# Altium PCB PCB Carte détéction Sans Ecriture.PCBDOC
Units mm, origin at the board's own origin, x right, y up, seen from the top; angles counter-clockwise.
Board outline 299.72 x 199.9 mm, 2 copper layers (Top Layer, Bottom Layer); 31 components, 27 nets, 123 pads, 37 vias.
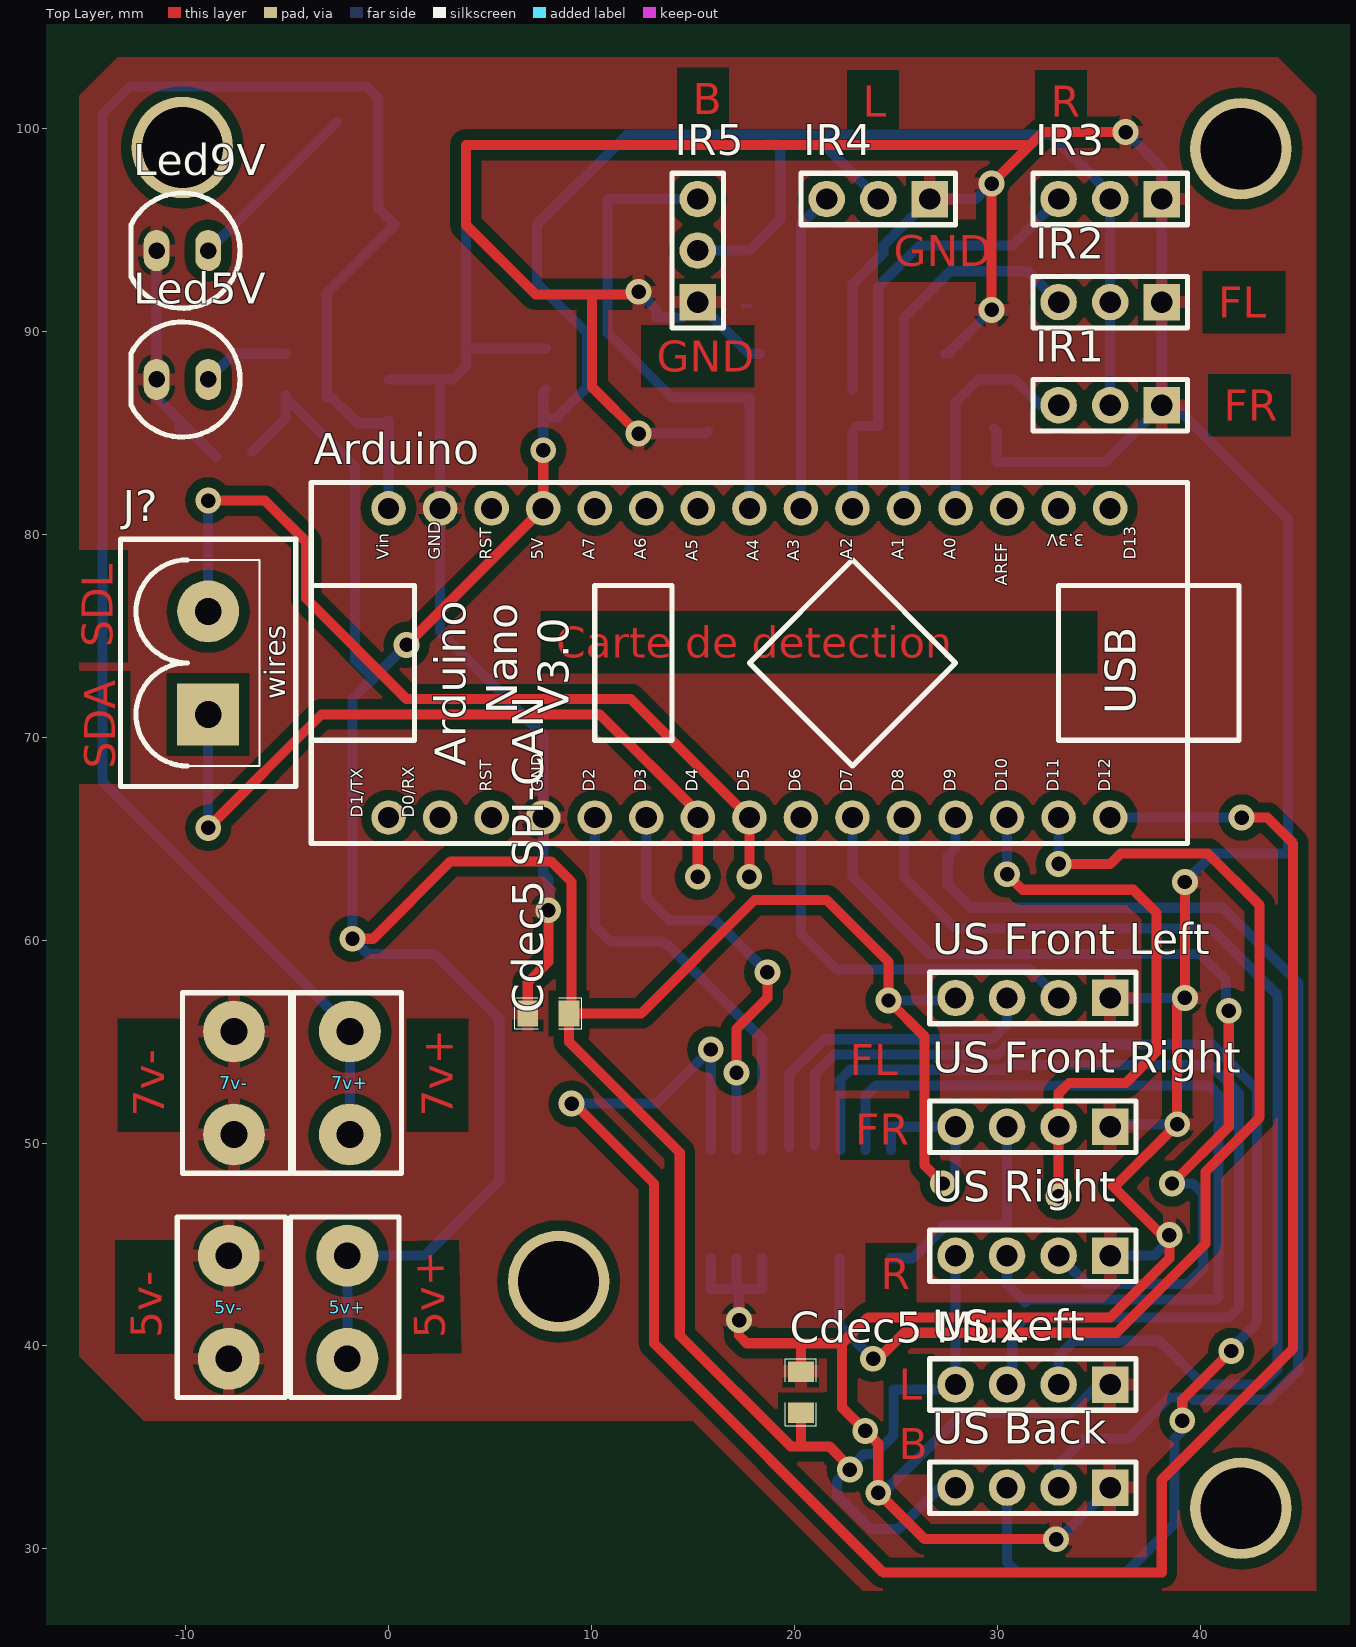
[diagram p0: Top Layer view]
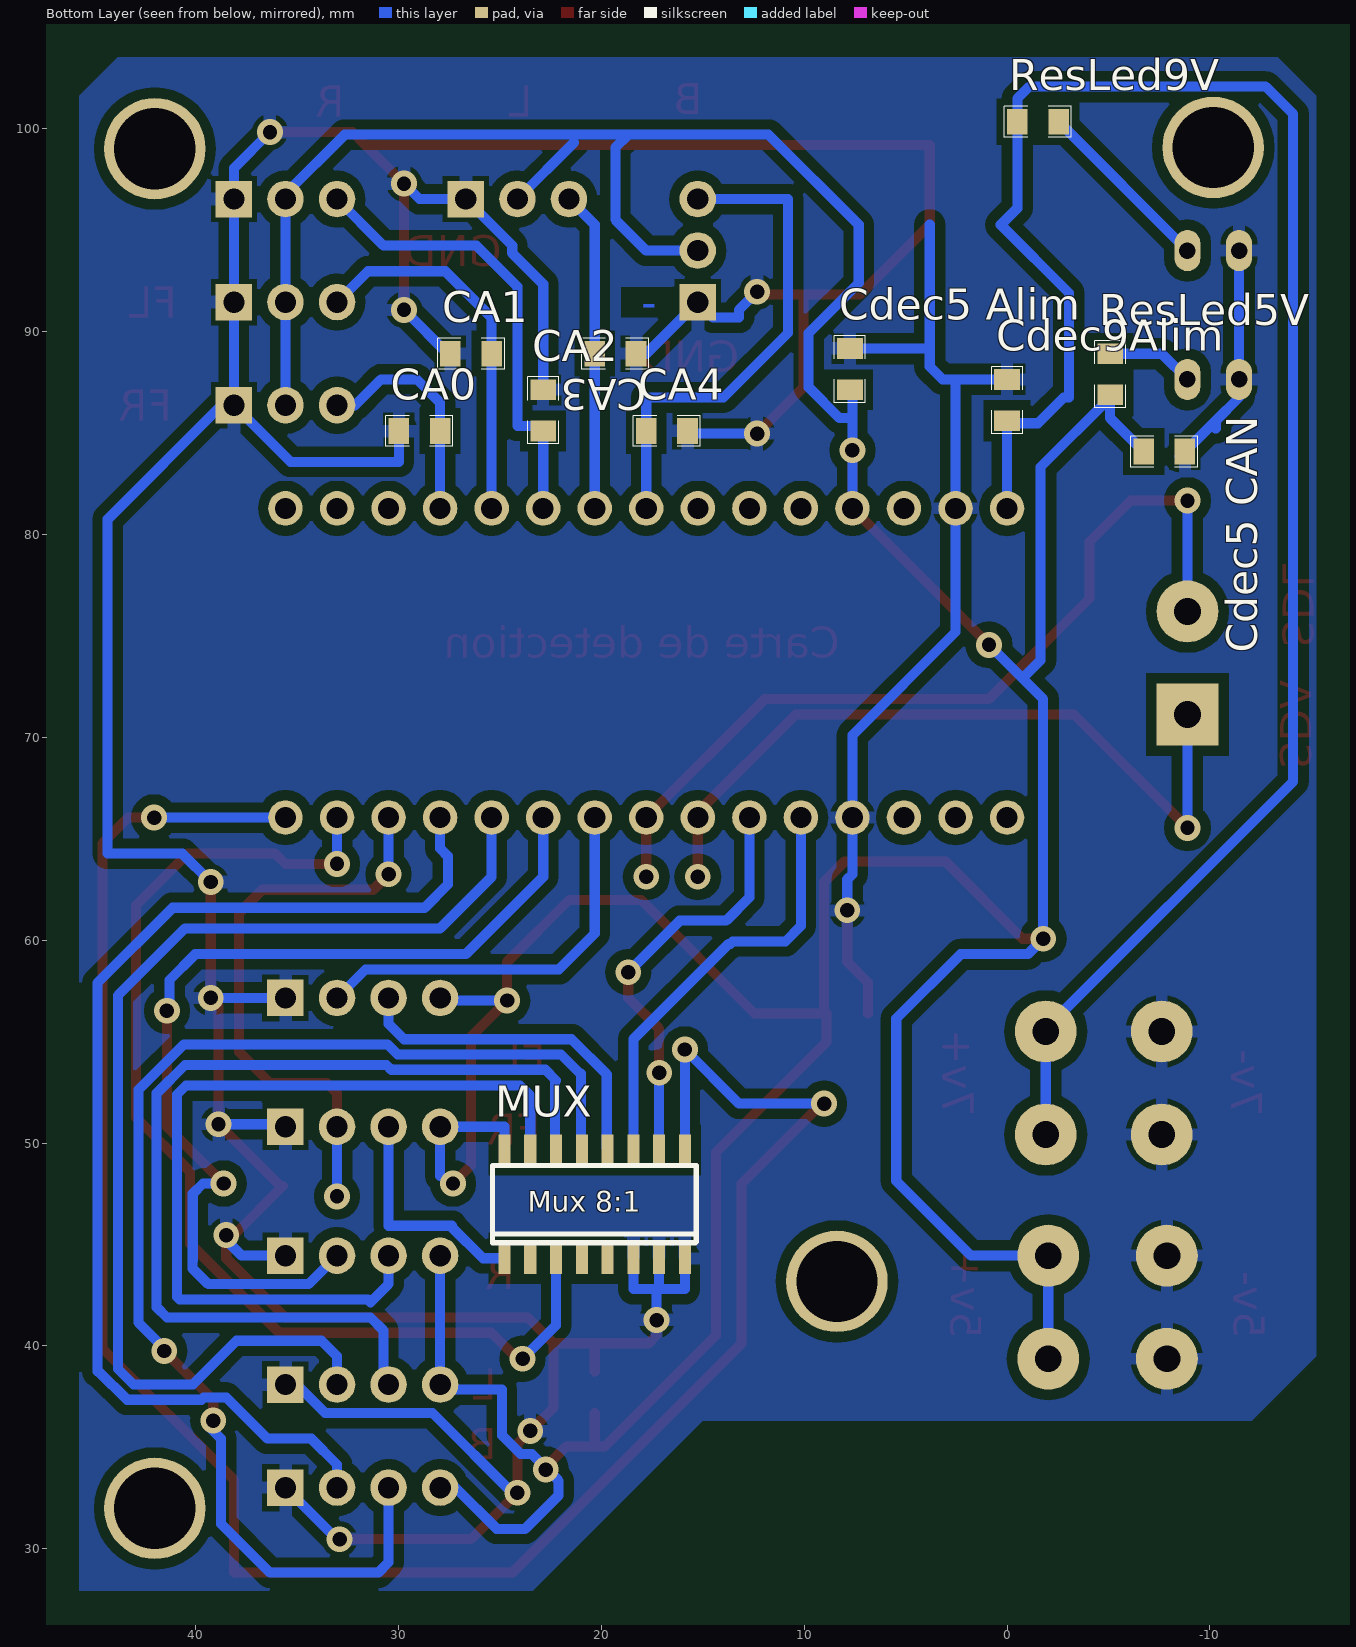
[diagram p1: Bottom Layer view, seen from below]

## Layer stack, top to bottom
Top Solder: solder mask 0.0102, Solder Resist, Dk 3.5
Top Layer: signal copper 0.0356
Dielectric1: dielectric 0.32, FR-4, Dk 4.8
Bottom Layer: signal copper 0.0356
Bottom Solder: solder mask 0.0102, Solder Resist, Dk 3.5

## Board outline
-41.96,-47.66 257.76,-47.66 257.76,152.238 -41.96,152.238

## Design rules (kind name [scope] priority, off if disabled: settings)
Clearance Clearance_bottom_polygon [OnLayer('Bottom Layer') Or OnLayer('Multi-Layer') vs OnLayer('Bottom Layer')  And  InPoly] p1: gap=0.508
Clearance Clearance_top_polygon [OnLayer('Top Layer')  Or OnLayer('Multi-Layer') vs OnLayer('Top Layer') And InPoly] p2: gap=0.508
Clearance Clearance_bottom [OnLayer('Bottom Layer') Or OnLayer('Multi-Layer') vs OnLayer('Bottom Layer')  And Not InPoly] p3: gap=0.254
Clearance Clearance_top [OnLayer('Top Layer')  Or OnLayer('Multi-Layer') vs OnLayer('Top Layer') And Not InPoly] p4: gap=0.254
Clearance Clearance_pad_to_pad [OnLayer('Multi-Layer') vs OnLayer('Multi-Layer')] p5: gap=0.254
ComponentClearance ComponentClearance_bottom [OnLayer('Bottom Overlay') vs OnLayer('Bottom Overlay')] p1: gap=0 collisioncheckmode=3 verticalgap=0.254 showdistances=FALSE
ComponentClearance ComponentClearance_top [OnLayer('Top Overlay') vs OnLayer('Top Overlay')] p2: gap=0 collisioncheckmode=3 verticalgap=0.254 showdistances=FALSE
FabricationTestPointUsage TestPointUsage [All] p1: valid=0 allowmultiple=FALSE
FabricationTestpoint Testpoint [All] p1: side=3 testpointundercomponent=TRUE minsize=1.016 maxsize=2.54 preferedsize=1.524 minholesize=0 maxholesize=1.016 preferedholesize=0.813 testpointgrid=0.025 allowsidetop=TRUE allowsidebottom=TRUE usegrid=TRUE gridtolerance=0
HoleSize [All] p1: absolutevalues=TRUE maxlimit=25.4 minlimit=0.406 maxpercent=80.000 minpercent=20.000
MinimumAnnularRing [PadXSize_AllLayers = PadYSize_AllLayers] p1: minimumring=0.203
PermittedLayers [All] p1: toplayerpermitted=TRUE bottomlayerpermitted=TRUE
PolygonConnect [All] p1: connectstyle=Relief reliefconductorwidth=0.61 reliefentries=4 polygonreliefangle="90 Angle" airgapwidth=0.254
RoutingVias [All] p1: holewidth=0.6 width=1.2 viastyle="Through Hole" minholewidth=0.4 minwidth=0.8 maxholewidth=0.6 maxwidth=10
SMDToPlane [All] p1: distance=0
SolderMaskExpansion [All] p1: expansion=0.102
ViasUnderSMD [All] p1: allowed=FALSE
Width Width_mechanical [OnLayer('Mechanical 1') or OnLayer(' Mechanical 4')] p1: maxlimit=0.254 minlimit=0.254 preferedwidth=0.254
Width Width_botom_top [OnLayer('Bottom Layer') or OnLayer('Top Layer')] p2: maxlimit=254 minlimit=0.5 preferedwidth=0.813 minimp=50.000000 maximp=50.000000 favimp=50.000000
26 further rules are at their usual default settings.

## Components (designator, comment, footprint, x,y, rotation, side; value= is the part's Value field where it differs from the comment)
5v+ "Connector_Cosse" Connector_Cosse -2.032,44.45 r0 top (schematic designator Vcc_5v_+)
5v- "Connector_Cosse" Connector_Cosse -7.874,39.37 r180 top (schematic designator Vcc_5v_-)
7v+ "Connector_Cosse" Connector_Cosse -1.905,55.499 r0 top (schematic designator Vcc_7v_+)
7v- "Connector_Cosse" Connector_Cosse -7.62,50.419 r180 top (schematic designator Vcc_7v_-)
Arduino "Arduino Nano" "Arduino Nano FootPrint" 15.24,73.66 r90 top
CA0 "CAP" 0805 27.94,85.09 r0 bottom
CA1 "CAP" 0805 25.4,88.9 r0 bottom
CA2 "CAP" 0805 22.86,85.09 r90 bottom
CA3 "CAP" 0805 20.32,88.9 r180 bottom
CA4 "CAP" 0805 17.78,85.09 r180 bottom
"Cdec5 Alim" "CAP" 0805 7.747,87.122 r90 bottom
"Cdec5 CAN" "CAP" 0805 -6.731,84.074 r180 bottom
"Cdec5 Mux" "CAP" 0805 20.32,36.703 r90 top
"Cdec5 SPI-CAN" "CAP" 0805 8.89,56.388 r180 top
Cdec9Alim "CAP" 0805 0,87.63 r270 bottom
IR1 "Connecteur InfraRouge" "Connecteur InfraRouge" 35.56,86.36 r90 top
IR2 "Connecteur InfraRouge" "Connecteur InfraRouge" 35.56,91.44 r90 top
IR3 "Connecteur InfraRouge" "Connecteur InfraRouge" 35.56,96.52 r90 top
IR4 "Connecteur InfraRouge" "Connecteur InfraRouge" 24.13,96.52 r90 top
IR5 "Connecteur InfraRouge" "Connecteur InfraRouge" 15.24,93.98 r0 top
J? "comment" AMP_2 -8.89,71.12 r90 top
Led5V "Blue" LED5 -11.43,87.63 r270 top
Led9V "Orange" LED5 -11.43,93.98 r270 top
MUX "MUX 8:1 CD4051B" "MUX 8:1*" 20.955,46.99 r180 bottom
ResLed5V "RES" 0805 -5.08,88.9 r270 bottom
ResLed9V "RES" 0805 -2.54,100.33 r0 bottom
"US Back" "Ultra Son" "Conecteur UltraSon" 31.75,33.02 r90 top
"US Front Left" "Ultra Son" "Conecteur UltraSon" 31.75,57.15 r90 top
"US Front Right" "Ultra Son" "Conecteur UltraSon" 31.75,50.8 r90 top
"US Left" "Ultra Son" "Conecteur UltraSon" 31.75,38.1 r90 top
"US Right" "Ultra Son" "Conecteur UltraSon" 31.75,44.45 r90 top

## Footprints (in the part's own frame and the unit in brackets; to place one, negate y for a bottom-side part, rotate by r counter-clockwise, add the part's x,y. Pads: shape width x height; smd on the part's side, far side on the other; paste and mask are expansions set on the pad)
0805 [mil]
  rect 40x50 smd: 1(0,0) 2(80,0)
  silkscreen extent -25,-30 105,30
AMP_2 [mil]
  rect 120x120 hole 52: 1(0,0)
  round 120 hole 52: 2(200,0)
  silkscreen extent -140,-170 340,170
"Arduino Nano FootPrint" [mm]
  round 1.7 hole 1.04: 1(-7.62,15.24) 2(-7.62,12.7) 3(-7.62,10.16) 4(-7.62,7.62) 5(-7.62,5.08) 6(-7.62,2.54) 7(-7.62,0) 8(-7.62,-2.54) 9(-7.62,-5.08) 10(-7.62,-7.62) 11(-7.62,-10.16) 12(-7.62,-12.7) 13(-7.62,-15.24) 14(-7.62,-17.78) 15(-7.62,-20.32) 16(7.62,-20.32) 17(7.62,-17.78) 18(7.62,-15.24) 19(7.62,-12.7) 20(7.62,-10.16) 21(7.62,-7.62) 22(7.62,-5.08) 23(7.62,-2.54) 24(7.62,0) 25(7.62,2.54) 26(7.62,5.08) 27(7.62,7.62) 28(7.62,10.16) 29(7.62,12.7) 30(7.62,15.24)
  silkscreen extent -8.89,-26.67 8.89,19.05
"Conecteur UltraSon" [mm]
  round 1.8 hole 1.05: 1(0,3.81) 2(0,1.27) 3(0,-1.27)
  rect 1.8x1.8 hole 1.05: 4(0,-3.81)
  silkscreen extent -1.27,-5.08 1.27,5.08
"Connecteur InfraRouge" [mm]
  round 1.8 hole 1.05: 1(0,2.54) 2(0,0)
  rect 1.8x1.8 hole 1.05: 3(0,-2.54)
  silkscreen extent -1.27,-3.81 1.27,3.81
Connector_Cosse [mil]
  round 120 hole 52.01: 1(0,-200) 1(0,0)
  silkscreen extent -110,-275 100,75
LED5 [mil] "5mm LED"
  oval 80x50 hole 32 unplated: A(0,100) K(0,0)
  silkscreen extent -112,-50 112,162
"MUX 8:1*" [mm]
  rect 0.6x1.54 smd: 1(-3.81,-2.667) 2(-2.54,-2.667) 3(-1.27,-2.667) 4(0,-2.667) 5(1.27,-2.667) 6(2.54,-2.667) 7(3.81,-2.667) 8(5.08,-2.667) 9(5.08,2.667) 10(3.81,2.667) 11(2.54,2.667) 12(1.27,2.667) 13(0,2.667) 14(-1.27,2.667) 15(-2.54,2.667) 16(-3.81,2.667)
  silkscreen extent -4.41,-1.9 5.64,1.9

## Part data
CA0 CA1 CA2 CA3 CA4 "Cdec5 Alim" "Cdec5 CAN" "Cdec5 Mux" "Cdec5 SPI-CAN" Cdec9Alim: "capacité non polarisée"
J?: library part POWER2, "connecteur alim 2 pôles"
Led5V Led9V: library part LED, "LED 5mm/3mm/CMS"
ResLed5V ResLed9V: "resistance"

## Free pads (board coordinates)
  round 5 hole 4: 0(-10.16,99.06) 0(8.382,43.18) 0(42,32) 0(42,99)

## Via types
v1: diameter 1.27, hole 0.711, Top Layer to Bottom Layer, 37 vias

## Nets (pads, with @x,y where several pads share a name; then routed paths per layer and width w, separated by ;. In a path a pad name is that pad's centre, name@x,y a point inside that pad or via, vN(x,y) a via of type N, cw(c..) or ccw(c..) an arc to the next point about the centre after c; other vN are vias at no path point)
3.3V: Arduino.17
A: Arduino.5 MUX.11 | length 21.4
  Bottom Layer w0.5: Arduino.5 10.16,60.698 10.922,59.936 13.52,59.936 13.639,59.817 13.716,59.817 18.415,55.118 MUX.11
A0: Arduino.19 CA0.1 IR1.1 | length 11.3
  Bottom Layer w0.5: Arduino.19 27.94,86.487 29.083,87.63 30.861,87.63 32.131,86.36 IR1.1
A1: Arduino.20 CA1.1 IR2.1 | length 18.6
  Bottom Layer w0.5: Arduino.20 CA1.1 25.4,90.678 27.686,92.964 31.496,92.964 IR2.1
A2: Arduino.21 CA2.1 IR3.1 | length 22.7
  Bottom Layer w0.5: Arduino.21 CA2.1 23.114,85.344 24.13,85.344 24.13,92.202 26.162,94.234 30.734,94.234 IR3.1
A3: Arduino.22 CA3.1 IR4.1 | length 15.8
  Bottom Layer w0.5: Arduino.22 CA3.1 20.32,95.25 IR4.1
A4: Arduino.23 CA4.1 IR5.1 | length 24.8
  Bottom Layer w0.5: IR5.1 10.795,96.52 10.795,89.916 13.97,86.741 17.78,86.741 Arduino.23
B: Arduino.6 MUX.10 | length 20.8
  Top Layer w0.5: v1(17.145,53.467) 17.145,55.626 18.669,57.15 v1(18.669,58.42)
  Bottom Layer w0.5: Arduino.6 12.7,62.103 13.843,60.96 16.129,60.96 v1(18.669,58.42) ; MUX.10 v1(17.145,53.467)
C: Arduino.15 MUX.9 | length 104.6
  Top Layer w0.5: v1@8.89,52.197 13.081,48.006 13.081,40.132 24.384,28.829 38.1,28.829 38.1,33.401 44.577,39.878 44.577,64.77 43.307,66.04 v1(42.037,66.04)
  Bottom Layer w0.5: v1(9.017,51.943) 13.208,51.943 v1(15.875,54.61) MUX.9 ; Arduino.15 v1(42.037,66.04)
D6: "US Front Left.3" Arduino.9 | length 19.7
  Bottom Layer w0.5: Arduino.9 20.32,60.325 22.091,58.554 31.616,58.554 33.02,57.15
D7: "US Right.3" Arduino.10 | length 48.1
  Top Layer w0.5: v1(38.608,48.006) 41.402,50.8 v1(41.402,56.515)
  Bottom Layer w0.5: Arduino.10 22.86,63.119 26.671,59.308 40.005,59.308 ; 33.02,44.45 34.425,43.045 39.362,43.045 40.148,43.831 40.148,44.196 40.132,44.212 40.132,47.498 39.624,48.006 v1(38.608,48.006) ; 40.005,59.309 41.275,58.039 41.275,56.642 v1(41.402,56.515)
D8: "US Left.3" Arduino.11 | length 55.9
  Bottom Layer w0.5: Arduino.11 25.4,63.119 27.94,60.579 40.513,60.579 43.815,57.277 43.815,38.862 43.053,38.1 40.132,38.1 37.973,40.259 33.782,40.259 33.02,39.497 33.02,38.1
D9: "US Back.3" Arduino.12 | length 56.8
  Bottom Layer w0.5: Arduino.12 27.94,64.516 27.559,64.135 27.559,62.738 28.702,61.595 41.122,61.595 44.831,57.886 44.831,38.735 44.754,38.735 43.365,37.346 39.703,37.346 39.588,37.461 38.477,37.461 36.449,35.433 34.29,35.433 33.02,34.163 33.02,33.02
D10: "US Front Right.3" Arduino.13 | length 32
  Top Layer w0.5: v1(30.48,63.246) 31.242,62.484 36.703,62.484 37.846,61.341 37.846,54.483 36.322,52.959 33.528,52.959 33.02,52.451 33.02,50.8 v1(33.02,47.371)
  Bottom Layer w0.5: v1(30.48,63.246) Arduino.13 ; v1(33.02,47.371) 33.02,50.8
GND: 5v-.1 7v-.1 "Cdec5 Alim.2" "Cdec5 CAN.2" "Cdec5 Mux.2" "Cdec5 SPI-CAN.2" "US Back.4" "US Front Left.4" "US Front Right.4" "US Left.4" "US Right.4" Arduino.4 Arduino.29 CA0.2 CA1.2 CA2.2 CA3.2 CA4.2 Cdec9Alim.1 IR1.3 IR2.3 IR3.3 IR4.3 IR5.3 Led5V.K Led9V.K MUX.6 MUX.7 MUX.8 | length 309.7
  Top Layer w0.5: 6.858,56.388 6.858,57.912 7.874,58.928 v1(7.874,61.468) ; v1(12.319,84.963) 10.033,87.249 10.033,91.821 ; v1(12.319,91.948) 12.192,91.821 10.033,91.821 ; v1(17.272,41.275) 17.272,40.513 17.653,40.132 20.193,40.132 ; 20.32,38.735 20.32,40.005 20.193,40.132 ; v1(29.718,91.059) v1(29.718,97.282) 31.623,99.187 ; v1(32.893,30.48) 26.416,30.48 v1(24.13,32.766) 24.13,35.179 v1(23.495,35.814) 22.352,36.957 22.352,40.132 ; v1(36.322,99.822) 32.258,99.822 31.623,99.187 ; v1(39.243,62.865) v1(39.243,57.15) 38.862,56.769 v1(38.862,50.927) 35.814,47.879 35.687,47.879 38.1,45.466 v1(38.481,45.466) 38.481,44.323 35.56,41.402 23.622,41.402 22.352,40.132 ; 10.033,91.821 7.239,91.821 3.81,95.25 3.81,99.187 31.623,99.187 ; 20.193,40.132 22.352,40.132
  Bottom Layer w0.5: Led9V.K Led5V.K -11.43,86.741 -10.287,85.598 ; -10.287,85.217 -10.287,85.598 ; -8.509,83.82 -8.763,84.074 -10.287,85.598 ; Cdec9Alim.1 2.667,87.63 ; 3.81,95.25 3.81,89.154 ; 7.747,89.154 3.81,89.154 ; v1(7.874,61.468) 7.874,62.992 7.62,63.246 Arduino.4 7.62,70.104 2.54,75.184 Arduino.29 2.54,87.503 2.667,87.63 ; v1(12.319,84.963) 15.621,84.963 CA4.2 ; v1(12.319,91.948) 13.208,91.059 13.208,90.678 14.478,90.678 IR5.3 17.78,88.9 CA3.2 ; MUX.8 15.875,42.799 17.145,42.799 ; MUX.7 17.145,42.799 ; v1(17.272,41.275) 17.272,42.672 17.145,42.799 ; MUX.6 18.415,42.799 17.145,42.799 ; CA2.2 22.86,92.329 24.384,93.853 24.384,94.234 IR4.3 28.956,96.52 v1(29.718,97.282) ; v1@24.257,32.639 28.314,36.696 33.602,36.696 35.006,38.1 35.56,38.1 ; CA1.2 27.559,88.9 v1@29.591,90.932 ; CA0.2@29.845,85.217 CA0.2 29.972,83.566 35.306,83.566 IR1.3 ; v1(32.893,30.48) 33.02,30.48 35.56,33.02 ; 35.56,44.45 37.719,44.45 v1@38.481,45.212 ; 35.56,50.8 35.687,50.927 v1(38.862,50.927) ; 35.56,57.15 v1(39.243,57.15) ; v1(36.322,99.822) 38.1,98.044 IR3.3 IR2.3 IR1.3 ; v1(39.243,62.865) 40.64,64.262 44.323,64.262 44.323,80.747 38.71,86.36 IR1.3 ; 2.667,87.63 3.175,87.63 3.81,88.265 3.81,89.154
NetLed5V_A: Led5V.A ResLed5V.1 | length 4.3
  Bottom Layer w0.5: Led5V.A -7.62,88.9 ResLed5V.1
NetLed9V_A: Led9V.A ResLed9V.1 | length 9
  Bottom Layer w0.5: Led9V.A ResLed9V.1
SDA: Arduino.7 J?.1 | length 37.2
  Top Layer w0.5: v1(-8.89,65.532) -3.302,71.12 10.414,71.12 15.24,66.294 Arduino.7 v1(15.24,63.119)
  Bottom Layer w0.5: v1(-8.89,65.532) J?.1
SDL: Arduino.8 J?.2 | length 43.2
  Top Layer w0.5: v1(-8.89,81.661) -6.096,81.661 -4.064,79.629 -4.064,76.835 0.897,71.874 11.946,71.874 Arduino.8 v1(17.78,63.119)
  Bottom Layer w0.5: J?.2 v1(-8.89,81.661)
TRIG: Arduino.14 MUX.3 | length 55.6
  Top Layer w0.5: v1(23.876,39.37) 24.13,39.37 25.408,40.648 35.872,40.648 40.259,45.035 40.259,48.591 42.926,51.258 42.926,61.722 40.386,64.262 36.068,64.262 35.56,63.754 v1(33.02,63.754)
  Bottom Layer w0.5: MUX.3 22.225,41.021 v1(23.876,39.37) ; v1(33.02,63.754) Arduino.14
"TRIG BACK": "US Back.2" MUX.13 | length 63.3
  Top Layer w0.5: v1(39.116,36.322) 39.116,37.338 v1(41.529,39.751)
  Bottom Layer w0.5: MUX.13@21,49.911 21,53.422 21.018,53.404 21.979,54.364 30.03,54.364 30.53,54.864 40.563,54.864 42.799,52.628 42.799,41.148 41.529,39.878 v1(41.529,39.751) ; 30.48,33.02 30.48,29.337 30.988,28.829 36.322,28.829 38.735,31.242 38.735,35.433 39.37,36.068 v1(39.116,36.322)
"TRIG FRONT LEFT": "US Front Left.2" MUX.12 | length 16.7
  Bottom Layer w0.5: MUX.12@19.73,49.784 19.73,53.385 21.463,55.118 29.718,55.118 30.48,55.88 30.48,57.15
"TRIG FRONT RIGHT": "US Front Right.2" MUX.1 | length 11.2
  Bottom Layer w0.5: MUX.1 25.827,44.323 27.358,45.854 ; 27.358,45.922 30.48,45.922 30.48,50.8
"TRIG LEFT": "US Left.2" MUX.14 | length 49
  Bottom Layer w0.5: MUX.14@22.27,49.657 22.27,53.041 22.225,53.086 22.749,53.61 30.343,53.61 30.581,53.848 40.513,53.848 41.91,52.451 41.91,41.91 41.402,41.402 31.369,41.402 30.734,40.767 30.734,38.354 30.48,38.1
"TRIG RIGHT": "US Right.2" MUX.15 | length 42.7
  Bottom Layer w0.5: MUX.15 23.495,52.324 24.003,52.832 40.463,52.832 40.902,52.393 40.902,42.426 40.767,42.291 31.504,42.291 31.369,42.156 30.48,43.045 30.48,44.45
"VCC 5V": 5v+.1 "Cdec5 Alim.1" "Cdec5 CAN.1" "Cdec5 Mux.1" "Cdec5 SPI-CAN.1" "US Back.1" "US Front Left.1" "US Front Right.1" "US Left.1" "US Right.1" Arduino.27 IR1.2 IR2.2 IR3.2 IR4.2 IR5.2 MUX.16 ResLed5V.2 | length 265.9
  Top Layer w0.5: v1(-1.778,60.071) -0.762,60.071 3.048,63.881 8.001,63.881 9.013,62.869 9.013,56.511 8.89,56.388 ; v1(0.889,74.549) Arduino.27 v1(7.62,84.138) ; 20.32,36.703 20.32,35.052 ; v1@22.733,34.163 22.606,34.163 21.717,35.052 20.32,35.052 ; v1(27.305,48.006) 26.416,48.895 26.416,55.245 v1(24.638,57.023) 24.638,58.928 21.59,61.976 18.034,61.976 12.446,56.388 8.89,56.388 ; 8.89,56.388 8.89,54.991 14.351,49.53 14.351,40.513 19.812,35.052 20.32,35.052
  Bottom Layer w0.5: -6.731,84.074 -5.08,85.725 ResLed5V.2@-5.08,86.741 ; ResLed5V.2 ResLed5V.2@-5.08,86.741 ; 5v+.1@-2.032,39.37 -2.032,44.45 1.778,44.45 5.461,48.133 5.461,56.134 2.286,59.309 -1.016,59.309 v1(-1.778,60.071) -1.778,71.882 -0.762,72.898 ; v1(0.889,74.549) -0.762,72.898 ; Arduino.27 v1(7.62,84.138) 7.62,85.725 ; 7.747,87.122 7.62,86.995 7.62,85.725 ; IR5.2@15.367,94.107 IR5.2 17.78,93.98 19.304,95.504 19.304,99.06 18.669,99.695 ; 21.336,99.314 IR4.2 ; v1(24.638,57.023) 27.813,57.023 27.94,57.15 ; MUX.16 24.765,50.8 27.94,50.8 27.94,48.387 ; 27.94,33.02 27.178,33.02 25.146,30.988 23.749,30.988 22.098,32.639 22.098,33.351 23.422,34.675 23.967,34.675 24.892,35.6 24.892,37.846 27.686,37.846 27.94,37.973 27.94,44.45 ; IR1.2 IR2.2 IR3.2 35.56,96.774 32.639,99.695 18.669,99.695 ; ResLed5V.2@-5.08,86.741 -1.651,83.312 -1.651,73.787 -0.762,72.898 ; 7.62,85.725 8.255,85.725 9.779,87.249 9.779,89.916 7.31,92.385 7.31,95.25 11.755,99.695 18.669,99.695
  other v1: 22.733,33.909
"VCC 7V": 7v+.1 Arduino.30 Cdec9Alim.2 ResLed9V.2 | length 94.1
  Bottom Layer w0.5: 7v+.1@-1.905,50.419 -1.905,55.499 -1.905,55.626 -14.097,67.818 -14.097,100.711 -12.744,102.064 -1.099,102.064 -0.508,101.473 ResLed9V.2 -0.508,96.068 0.31,95.25 -3.048,91.892 -3.048,86.741 -2.794,86.741 -1.524,85.471 -0.127,85.471 Cdec9Alim.2 Arduino.30
pads on no net: Arduino.1 Arduino.2 Arduino.3 Arduino.16 Arduino.18 Arduino.24 Arduino.25 Arduino.26 Arduino.28 MUX.2 MUX.4 MUX.5

## Polygon pours and split planes (outlines as drawn)
GND on Bottom Layer "Mechanical 1-No Net" (solid, pour order 6): 14.986,36.322 23.368,27.94 45.72,27.94 45.72,101.6 43.815,103.505 -13.335,103.505 -15.24,101.6 -15.24,39.497 -12.065,36.322
GND on Top Layer "Mechanical 1-No Net" (solid, pour order 8): -13.335,103.505 -15.24,101.6 -15.24,39.497 -12.065,36.322 14.986,36.322 23.368,27.94 45.72,27.94 45.72,101.6 43.815,103.505

## Keep-outs
Keep-Out Layer:
  rectangle: -36,151 249,156
  rectangle: 249,-39 254,156
  rectangle: -36,-44 254,-39
  rectangle: -41,-44 -36,156

## Other copper
Top Layer:
  text "B" at 14.986,100.711 h1.52
  text "L" at 23.368,100.584 h1.52
  text "R" at 32.639,100.584 h1.52
  text "GND" at 24.892,93.218 h1.52
  text "FL" at 40.894,90.678 h1.52
  text "GND" at 13.208,88.011 h1.52
  text "FR" at 41.148,85.598 h1.52
  text "SDL" at -13.589,74.422 h1.52 r90
  text "Carte de detection" at 8.255,73.914 h1.52
  text "SDA" at -13.462,68.453 h1.52 r90
  text "FL" at 22.733,53.34 h1.52
  text "FR" at 22.987,49.911 h1.52
  text "R" at 24.257,42.799 h1.52
  text "L" at 25.146,37.338 h1.52
  text "B" at 25.146,34.417 h1.52
Bottom Layer:
  text "-" at 17.272,90.678 h1.52

## Silkscreen, mask and mechanical layers (free items; w line width, h text height)
Mechanical 1:
  lines w0.254: -15.24,39.497 -15.24,101.6 -13.335,103.505 43.815,103.505 45.085,102.235 45.72,101.6 45.72,27.94 23.368,27.94 14.986,36.322 -12.065,36.322 -15.24,39.497

## Text inside footprints (layer, text, board x,y; h text height)
Arduino: Top Overlay "USB" at 36.83,71.12 h1.52 r90; Top Overlay "Nano" at 6.35,71.12 h1.52 r90; Top Overlay "V3.0" at 8.89,71.12 h1.52 r90; Top Overlay "A7" at 10.16,78.74 h0.6 r90; Top Overlay "A6" at 12.7,78.74 h0.6 r90; Top Overlay "A5" at 15.24,78.66 h0.6 r90; Top Overlay "A4" at 18.24,78.66 h0.6 r90; Top Overlay "A3" at 20.24,78.66 h0.6 r90; Top Overlay "A2" at 22.86,78.74 h0.6 r90; Top Overlay "A1" at 25.4,78.74 h0.6 r90; Top Overlay "A0" at 27.94,78.74 h0.6 r90; Top Overlay "Vin" at 0,78.74 h0.6 r90; Top Overlay "GND" at 2.54,78.74 h0.6 r90; Top Overlay "RST" at 5.08,78.74 h0.6 r90; Top Overlay "5V" at 7.62,78.74 h0.6 r90; Top Overlay "AREF" at 30.48,77.47 h0.6 r90; Top Overlay "3.3V" at 34.29,80.01 h0.6 r180; Top Overlay "D13" at 36.83,78.74 h0.6 r90; Top Overlay "D1/TX" at -1.27,66.04 h0.6 r90; Top Overlay "D0/RX" at 1.27,66.04 h0.6 r90; Top Overlay "RST" at 5.08,67.31 h0.6 r90; Top Overlay "GND" at 7.62,67.31 h0.6 r90; Top Overlay "D2" at 10.16,67.31 h0.6 r90; Top Overlay "D3" at 12.7,67.31 h0.6 r90; Top Overlay "D4" at 15.24,67.31 h0.6 r90; Top Overlay "D5" at 17.78,67.31 h0.6 r90; Top Overlay "D6" at 20.32,67.31 h0.6 r90; Top Overlay "D7" at 22.86,67.31 h0.6 r90; Top Overlay "D8" at 25.4,67.31 h0.6 r90; Top Overlay "D9" at 27.94,67.31 h0.6 r90; Top Overlay "D10" at 30.48,67.31 h0.6 r90; Top Overlay "D11" at 33.02,67.31 h0.6 r90; Top Overlay "D12" at 35.56,67.31 h0.6 r90
J?: Top Overlay "wires" at -5.08,71.882 h1 r90
MUX: Bottom Overlay "Mux 8:1" at 23.622,46.609 h1